# Altium PCB mahdi_ashrafi_moghadam.PcbDoc
Units mm, origin at the board's own origin, x right, y up, seen from the top; angles counter-clockwise.
Board outline 100.08 x 90.01 mm, 2 copper layers (Top Layer, Bottom Layer); 28 components, 23 nets, 114 pads, 16 vias.
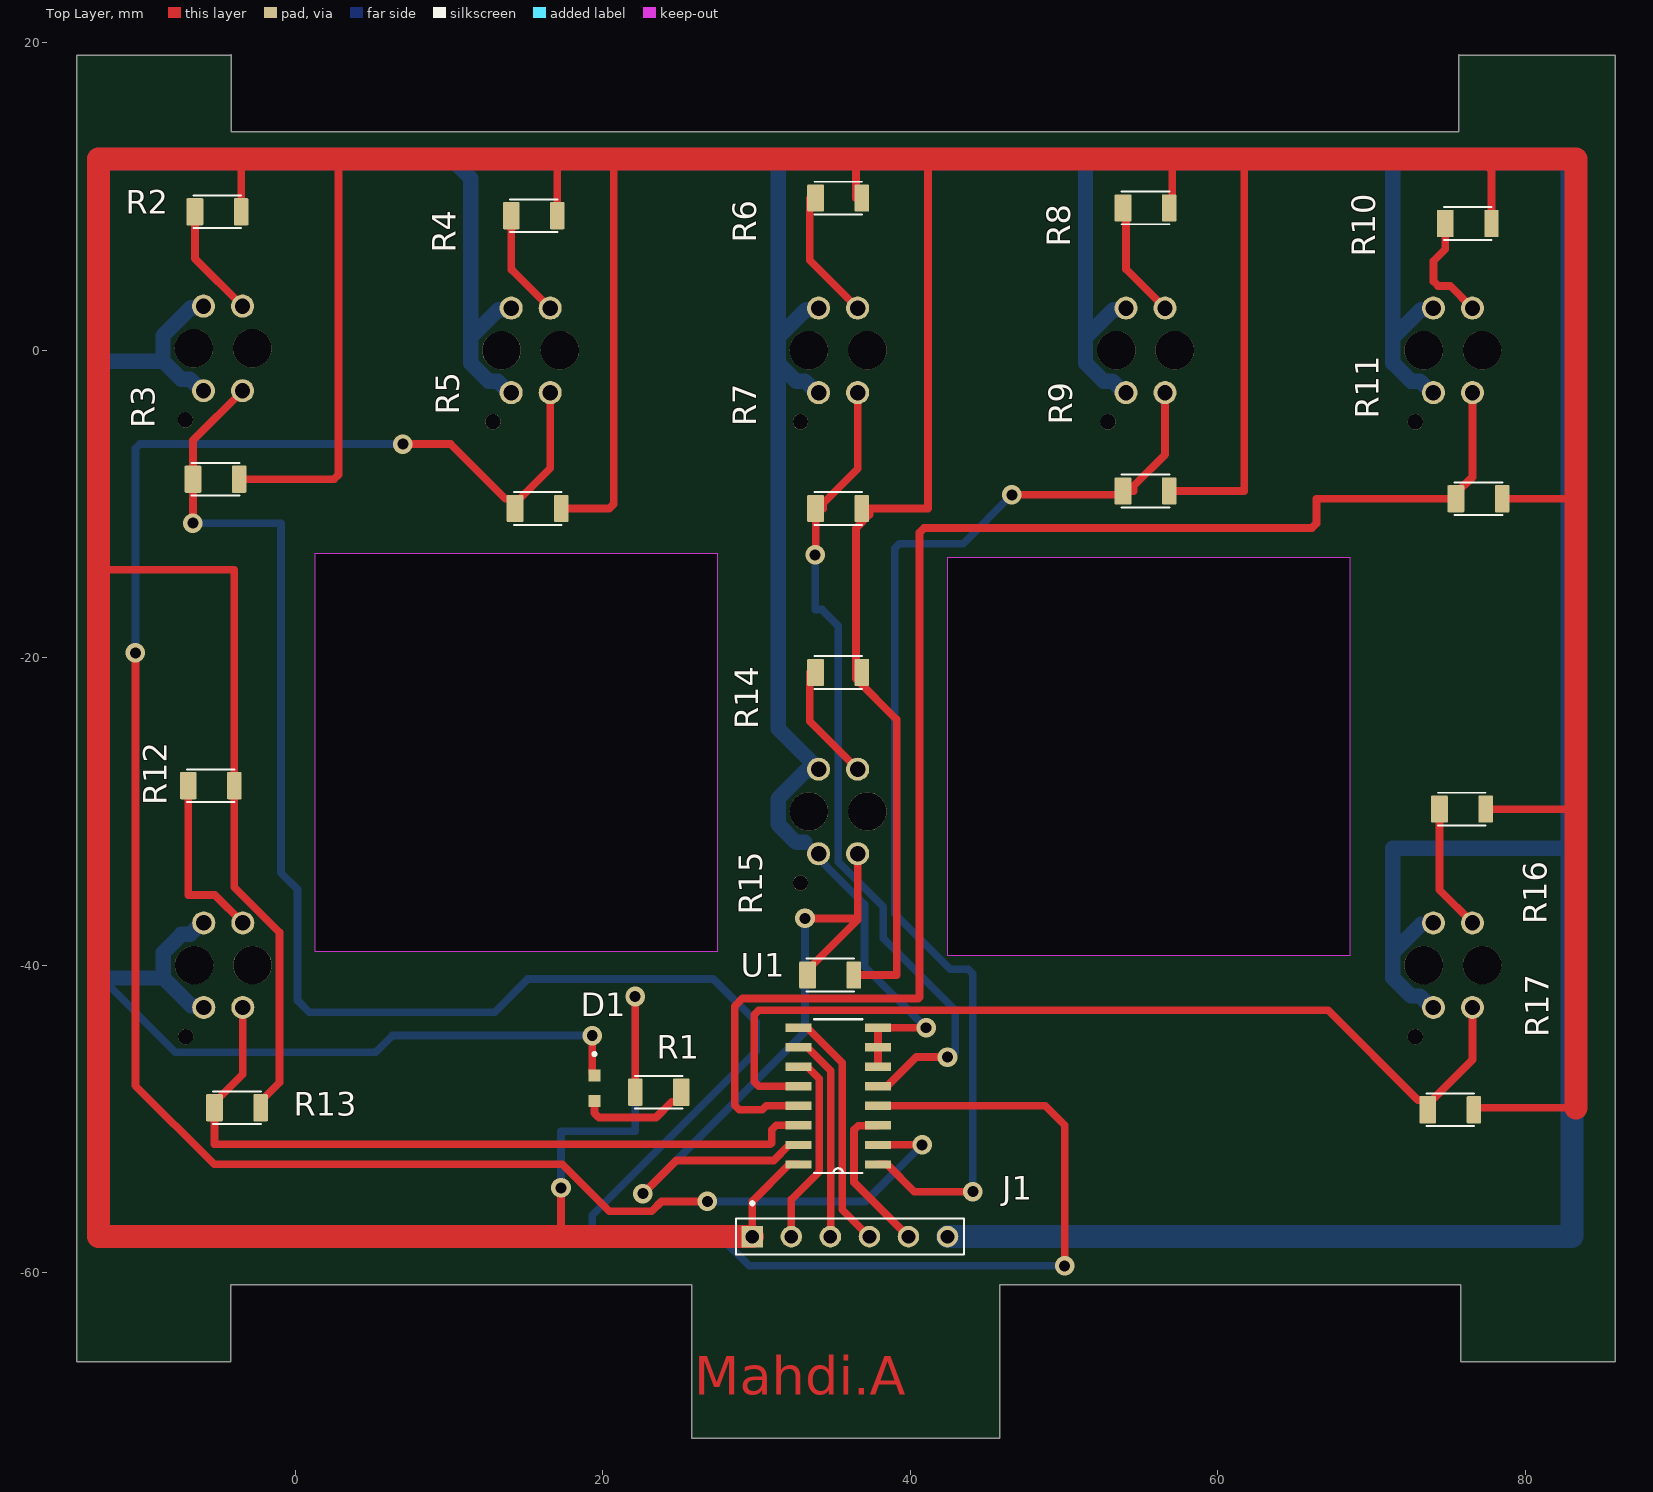
[diagram p0: Top Layer view]
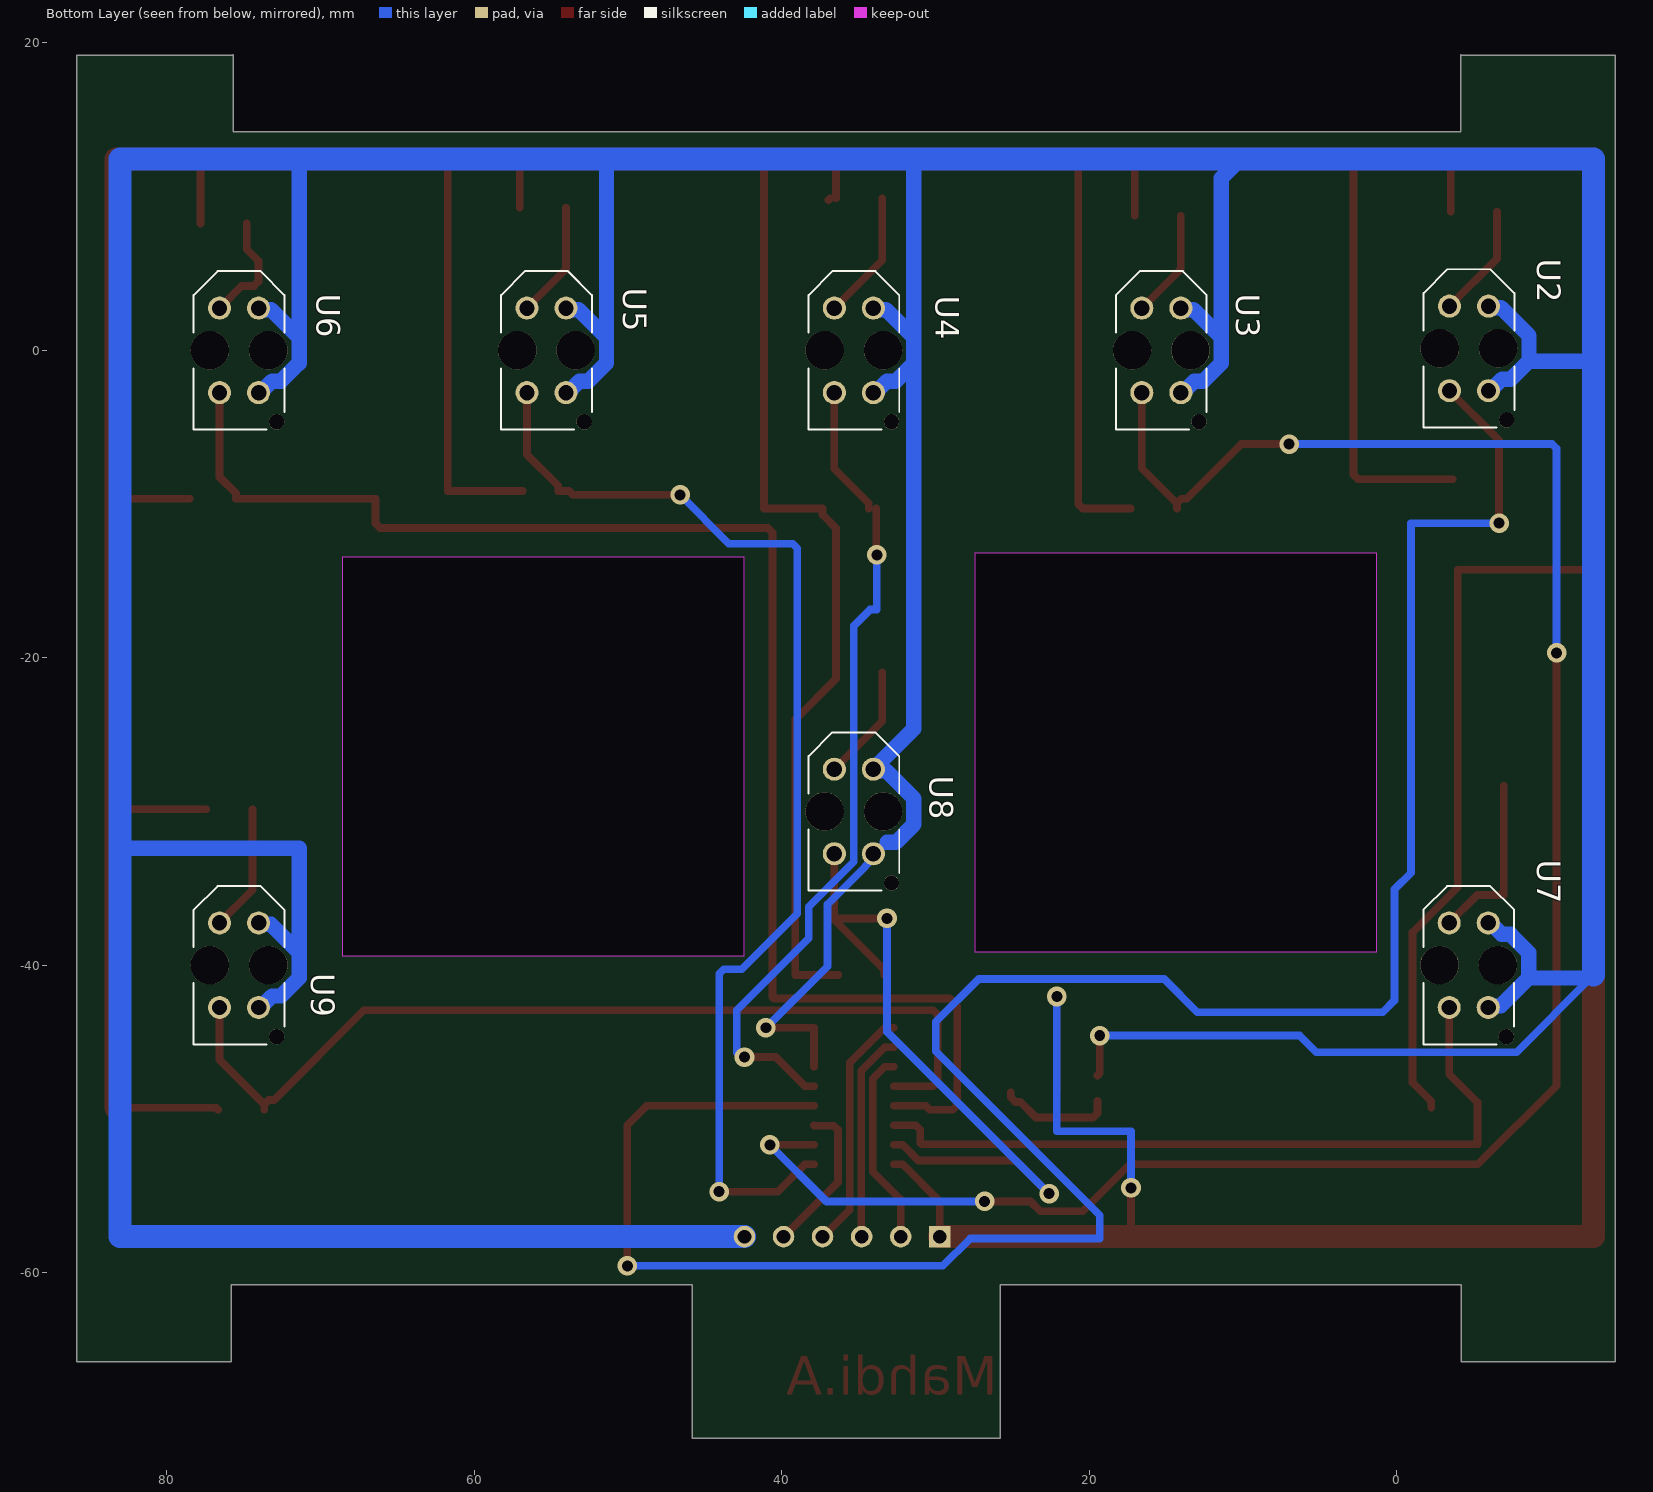
[diagram p1: Bottom Layer view, seen from below]
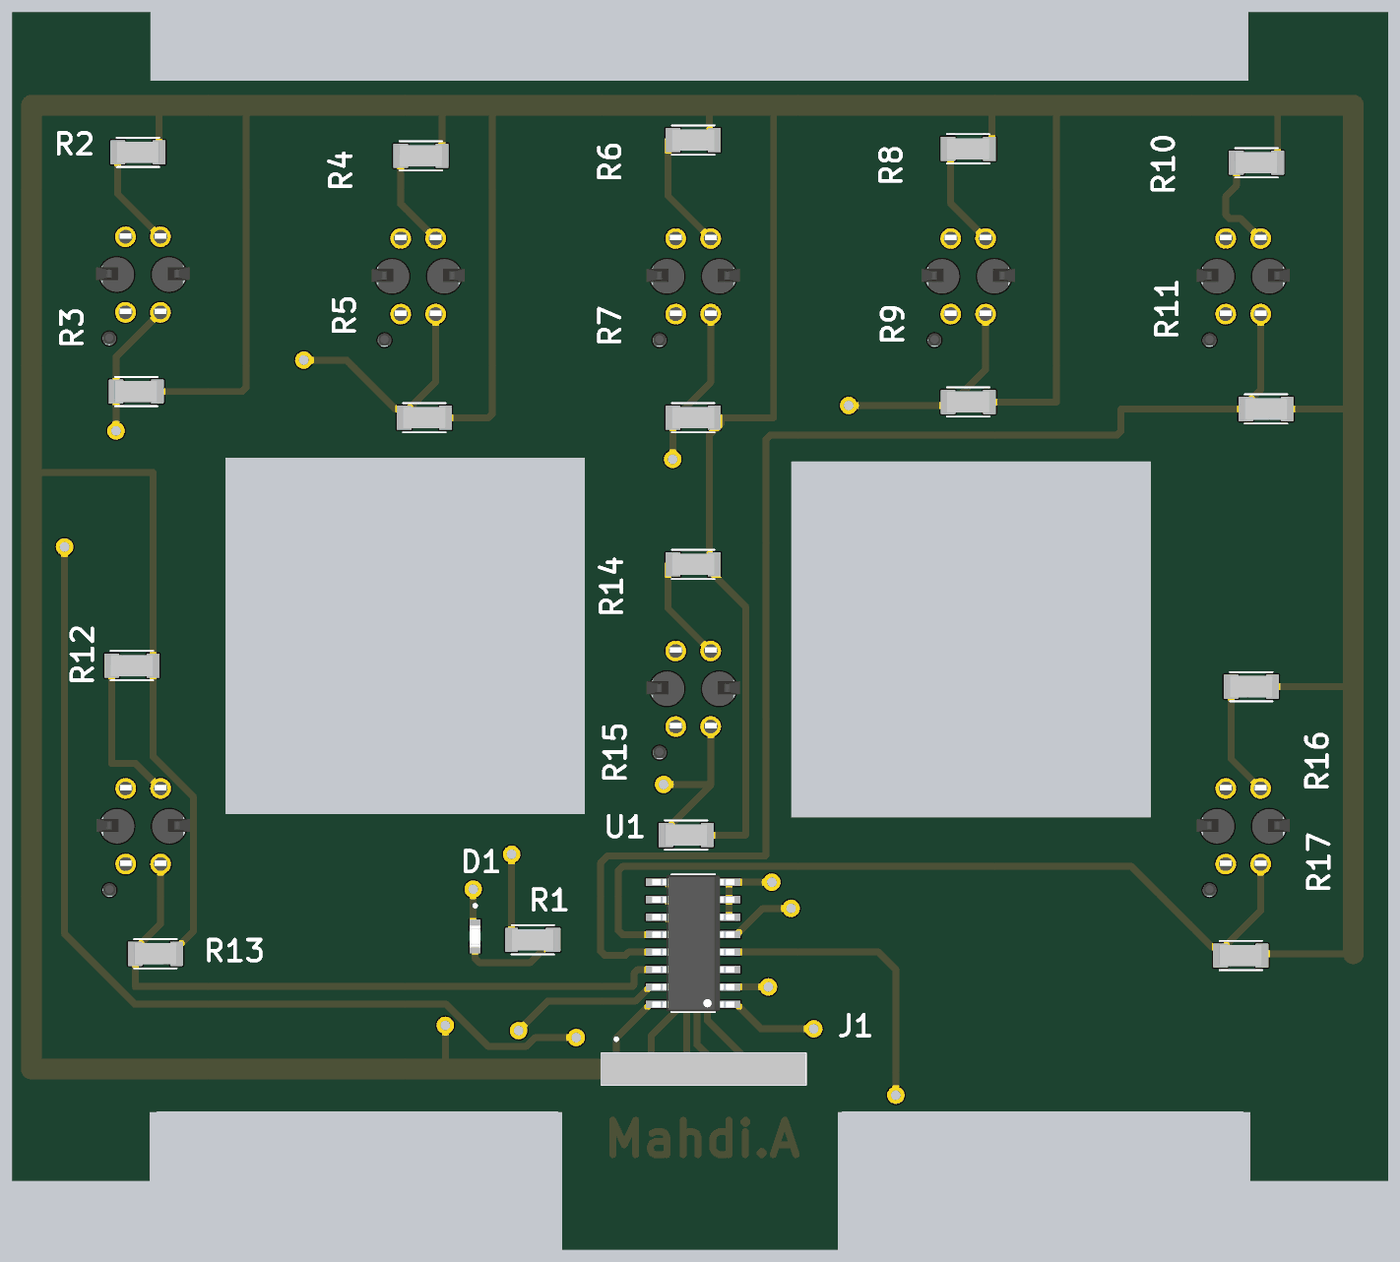
[diagram p2: 3D render of the assembled board from above, using the file's embedded part models]
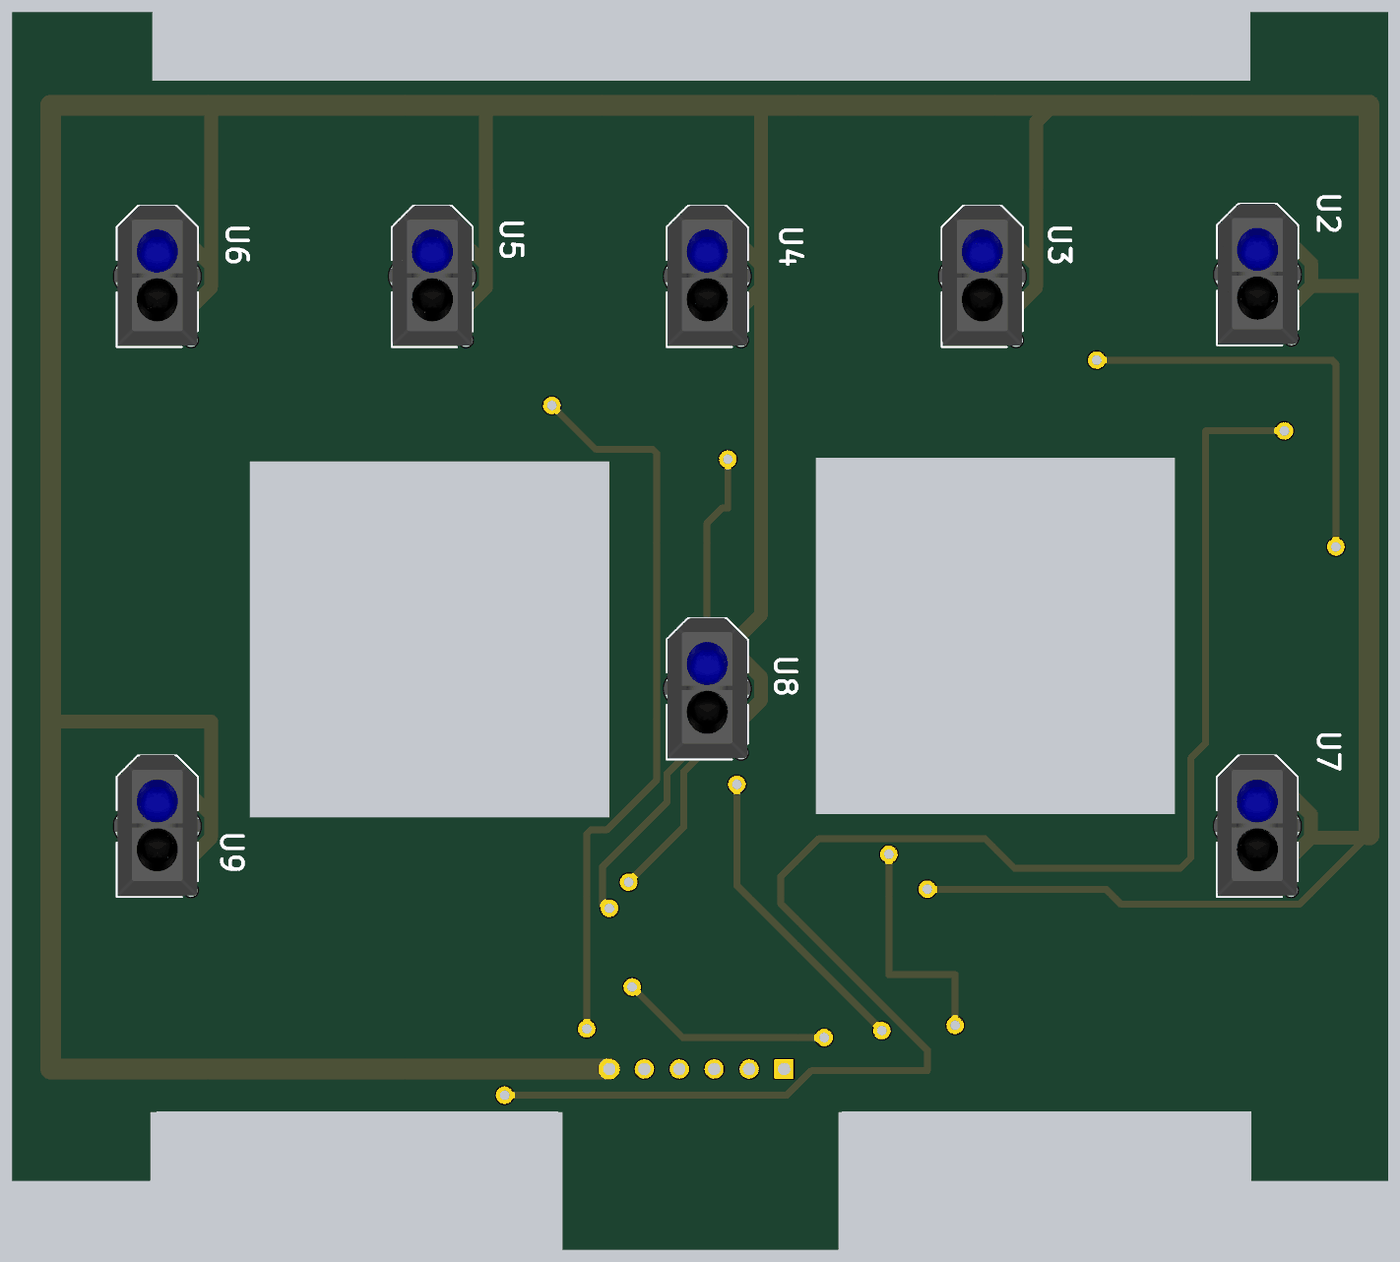
[diagram p3: 3D render of the assembled board from below, using the file's embedded part models]

## Layer stack, top to bottom
Top Solder: solder mask 0.0102, Solder Resist, Dk 3.5
Top Layer: signal copper 0.0356
Dielectric 1: dielectric 0.32, FR-4, Dk 4.8
Bottom Layer: signal copper 0.0356
Bottom Solder: solder mask 0.0102, Solder Resist, Dk 3.5

## Board outline
-14.224,-65.786 -4.224,-65.786 -4.224,-60.786 25.776,-60.786 25.776,-70.786 45.819,-70.786 45.819,-60.786 75.819,-60.786 75.819,-65.786 85.852,-65.786 85.852,19.214 75.729,19.214 75.692,19.224 75.692,14.224 -4.191,14.224 -4.191,19.224 -4.224,19.214 -14.224,19.214
cut-out: 68.58,-13.462 68.58,-39.37 42.418,-39.37 42.418,-13.462
cut-out: 27.432,-13.208 27.432,-39.116 1.27,-39.116 1.27,-13.208

## Design rules (kind name [scope] priority, off if disabled: settings)
Clearance [All] p1: gap=0.254 ignorepadtopadclearanceinfootprint=FALSE except(0: Arc-Hole Track-Hole SMDPad-Hole THPad-Hole Via-Hole Fill-Hole Poly-Hole Region-Hole Text-Hole)
PolygonConnect [All] p1: connectstyle=Relief reliefconductorwidth=0.254 reliefentries=4 polygonreliefangle="90 Angle" airgapwidth=0.254
RoutingVias [All] p1: holewidth=0.711 width=1.27 viastyle="Through Hole" minholewidth=0.711 minwidth=1.27 maxholewidth=0.711 maxwidth=1.27
SolderMaskExpansion [All] p1: expansion=0.102 istentingtop=FALSE
Width [All] p1: maxlimit=1.5 minlimit=0.5 preferedwidth=1 minimp=50.000000 maximp=50.000000 favimp=50.000000
30 further rules are at their usual default settings.

## Components (designator, comment, footprint, x,y, rotation, side; value= is the part's Value field where it differs from the comment)
D1 "KPT-1608ZGC" LED_KPT-1608ZGC 19.447,-48.006 r270 top
J1 "103321-6" TE_103321-6 36.068,-57.658 r0 top
R1 "2-1879462-9" RESC3115X65N 23.638,-48.26 r180 top
R2 "2-1879462-9" RESC3115X65N -5.08,9.017 r0 top
R3 "2-1879462-9" RESC3115X65N -5.207,-8.382 r0 top
R4 "2-1879462-9" RESC3115X65N 15.494,8.763 r0 top
R5 "2-1879462-9" RESC3115X65N 15.748,-10.287 r0 top
R6 "2-1879462-9" RESC3115X65N 35.301,9.906 r0 top
R7 "2-1879462-9" RESC3115X65N 35.301,-10.287 r0 top
R8 "2-1879462-9" RESC3115X65N 55.301,9.271 r0 top
R9 "2-1879462-9" RESC3115X65N 55.301,-9.144 r0 top
R10 "2-1879462-9" RESC3115X65N 76.268,8.255 r0 top
R11 "2-1879462-9" RESC3115X65N 76.962,-9.652 r0 top
R12 "2-1879462-9" RESC3115X65N -5.52,-28.321 r0 top
R13 "2-1879462-9" RESC3115X65N -3.81,-49.276 r0 top
R14 "2-1879462-9" RESC3115X65N 35.301,-20.955 r0 top
R15 "2-1879462-9" RESC3115X65N 34.782,-40.64 r0 top
R16 "2-1879462-9" RESC3115X65N 75.887,-29.845 r0 top
R17 "2-1879462-9" RESC3115X65N 75.125,-49.403 r0 top
U1 "74HC4051D" SOIC127P600X175-16N 35.306,-48.514 r180 top
U2 "TCRT5000" OPTO_TCRT5000 -4.715,0.127 r90 bottom
U3 "TCRT5000" OPTO_TCRT5000 15.301,0 r90 bottom
U4 "TCRT5000" OPTO_TCRT5000 35.301,0 r90 bottom
U5 "TCRT5000" OPTO_TCRT5000 55.301,0 r90 bottom
U6 "TCRT5000" OPTO_TCRT5000 75.301,0 r90 bottom
U7 "TCRT5000" OPTO_TCRT5000 -4.699,-40 r90 bottom
U8 "TCRT5000" OPTO_TCRT5000 35.301,-30 r90 bottom
U9 "TCRT5000" OPTO_TCRT5000 75.301,-40 r90 bottom

## Footprints (in the part's own frame and the unit in brackets; to place one, negate y for a bottom-side part, rotate by r counter-clockwise, add the part's x,y. Pads: shape width x height; smd on the part's side, far side on the other; paste and mask are expansions set on the pad)
LED_KPT-1608ZGC [mm]
  rect 0.8x0.8 smd: 1(0.825,0) 2(-0.825,0)
  silkscreen extent -2.32,-0.1 -2.13,0.1, body extent -0.8,-0.4 0.8,0.4, height 1.1
OPTO_TCRT5000 [mm]
  round 1.5 hole 1: A(2.75,1.27) CATH(2.75,-1.27) COLL(-2.75,1.27) E(-2.75,-1.27)
  round 1 hole 1 unplated: ""(-4.65,-2.45)
  round 2.5 hole 2.5 unplated: ""(0,-1.9) ""(0,1.9)
  silkscreen extent -5.15,-2.95 5.15,2.95, body extent -5.04,-3.4 5.16,3.4, height 7.2
RESC3115X65N [mm]
  rrect14% 1.09x1.77 smd: 1(-1.465,0)
  rrect14% 0.94x1.77 smd: 2(1.54,0)
  silkscreen extent -1.55,-1.06 1.55,1.06, body extent -1.55,-0.77 1.55,0.77, height 0.56
SOIC127P600X175-16N [mil]
  rect 67x21 smd: 1(-102,175) 2(-102,125) 3(-102,75) 4(-102,25) 5(-102,-25) 6(-102,-75) 7(-102,-125) 8(-102,-175) 9(102,-175) 10(102,-125) 11(102,-75) 12(102,-25) 13(102,25) 14(102,75) 15(102,125) 16(102,175)
  silkscreen extent -62,-197 62,197, body extent -118,-195 118,195, height 69
TE_103321-6 [mm]
  rect 1.398x1.398 hole 0.89: 1(-6.35,0)
  round 1.398 hole 0.89: 2(-3.81,0) 3(-1.27,0) 4(1.27,0) 5(3.81,0) 6(6.35,0)
  silkscreen extent -7.42,-1.17 7.42,2.27, body extent -7.42,-1.17 7.42,1.17, height 10.58

## Part data
D1: "1.6x0.8mm Smd Chip Led Lamp", Package="0603 Kingbright", Availability="In Stock", Check_prices=https://www.snapeda.com/parts/KPT-1608ZGC/Kingbright/view-part/?ref=eda, MF=Kingbright, MP=KPT-1608ZGC, Price=None, SnapEDA_Link=https://www.snapeda.com/parts/KPT-1608ZGC/Kingbright/view-part/?ref=snap
J1: "Pin 06 MODII HDR SRST B / A .100CL 6 POS", Package=None, Availability=Unavailable, MF="TE Connectivity", Mouser-Purchase-URL=https://snapeda.com/shop?store=Mouser&id=4238467, MP=103321-6, Price=None, SnapEDA_Link=https://www.snapeda.com/parts/103321-6/TE%20Connectivity/view-part/4238467/?ref=snap
R1 R2 R3 R4 R5 R6 R7 R8 R9 R10 R11 R12 R13 R14 R15 R16 R17: "RES 0.24 OHM 1% 1/4W 1206", Package=1206, Power_Rating=".25 W", Resistance=24, Tolerance=1%, Availability=Unavailable, EU_RoHS_Compliance="Compliant with Exemptions", MF="TE Connectivity", MP=2-1879462-9, Price=None, SnapEDA_Link=https://www.snapeda.com/parts/2-1879462-9/TE%20Connectivity/view-part/2213899/?ref=snap
U1: "1 Circuit IC Switch 8:1 130Ohm 16-SOIC", Package="SOIC-16 Toshiba", Availability="In Stock", Check_prices=https://www.snapeda.com/parts/74HC4051D/Toshiba/view-part/?ref=eda, MF=Toshiba, MP=74HC4051D, Price=None, Purchase-URL=https://pricing.snapeda.com/search/part/74HC4051D/?ref=eda, SnapEDA_Link=https://www.snapeda.com/parts/74HC4051D/Toshiba/view-part/?ref=snap
U2 U3 U4 U5 U6 U7 U8 U9: "950 nm 60 mA Through Hole Reflective Optical Sensor with Transistor Output", Package=None, Availability=Unavailable, MP=TCRT5000, Price=None

## Via types
v1: diameter 1.27, hole 0.711, Top Layer to Bottom Layer, 16 vias

## Nets (pads, with @x,y where several pads share a name; then routed paths per layer and width w, separated by ;. In a path a pad name is that pad's centre, name@x,y a point inside that pad or via, vN(x,y) a via of type N, cw(c..) or ccw(c..) an arc to the next point about the centre after c; other vN are vias at no path point)
+5: J1.1 R1.2 R2.2 R3.2 R4.2 R5.2 R6.2 R7.2 R8.2 R9.2 R10.2 R11.2 R12.2 R13.2 R14.2 R15.2 R16.2 R17.2 U1.16 | length 525.5
  Top Layer w0.5: -12.827,-14.097 -12.657,-14.267 -3.98,-14.267 R12.2 -3.98,-34.926 -1.045,-37.861 -1.045,-47.636 -2.27,-48.861 R13.2 ; -4.064,12.446 -3.54,11.922 R2.2 ; R3.2 2.501,-8.382 2.794,-8.089 2.794,12.446 ; 16.891,12.446 17.034,12.303 R4.2 ; v1(17.272,-54.483) 17.272,-57.531 17.399,-57.658 ; R5.2 20.408,-10.287 20.701,-9.994 20.701,12.192 20.447,12.446 ; R1.2 v1(22.098,-42.037) ; J1.1 29.718,-55.372 32.131,-52.959 U1.16 ; R15.2 39.116,-40.64 39.116,-24.021 36.465,-21.37 36.465,-11.575 37.338,-10.702 37.338,-10.287 41.148,-10.287 41.148,12.192 40.894,12.446 ; R6.2@36.465,9.906 36.465,12.335 36.576,12.446 ; R6.2 36.841,9.895 R6.2@36.957,9.779 ; R9.2 61.722,-9.144 61.722,12.319 61.595,12.446 ; 57.023,12.446 57.039,12.43 R8.2@57.039,9.271 ; R17.2 76.792,-49.276 83.312,-49.276 ; 77.089,12.446 77.808,11.727 R10.2 ; R16.2 83.058,-29.845 83.312,-30.099 ; R11.2 83.312,-9.652
  Top Layer w1.5: J1.1 17.399,-57.658 -12.827,-57.658 -12.827,-14.097 -12.827,12.446 -4.064,12.446 2.794,12.446 16.891,12.446 20.447,12.446 36.576,12.446 40.894,12.446 57.023,12.446 61.595,12.446 77.089,12.446 83.312,12.446 83.312,-9.652 83.312,-30.099 83.312,-49.276
  Bottom Layer w0.5: v1(17.272,-54.483) 17.272,-50.8 22.098,-50.8 v1(22.098,-42.037)
GND: D1.2 J1.6 U1.6 U1.7 U1.8 U2.CATH U2.E U3.CATH U3.E U4.CATH U4.E U5.CATH U5.E U6.CATH U6.E U7.CATH U7.E U8.CATH U8.E U9.CATH U9.E | length 486.5
  Top Layer w0.5: v1(19.304,-44.577) 19.304,-47.038 D1.2 ; U1.6 U1.7 U1.8 v1(41.021,-44.069)
  Bottom Layer w0.5: -12.637,-40.83 -7.813,-45.654 5.227,-45.654 6.304,-44.577 v1(19.304,-44.577) ; 33.15,-32.004 33.963,-32.818 33.963,-32.953 34.563,-33.553 34.563,-33.582 37.012,-36.03 37.012,-40.06 v1(41.021,-44.069)
  Bottom Layer w1: -12.827,-40.64 -12.637,-40.83 -8.603,-40.83 ; -12.827,-0.635 -12.759,-0.703 -8.619,-0.703 ; U2.E -6.12,-2.623 -6.866,-1.877 -7.445,-1.877 -8.619,-0.703 ; U2.CATH -6.081,2.781 -6.795,2.781 -8.619,0.957 -8.619,-0.703 ; U7.E -6.065,-42.654 -6.779,-42.654 -8.603,-40.83 ; U7.CATH -6.104,-37.25 -6.85,-37.996 -7.429,-37.996 -8.603,-39.17 -8.603,-40.83 ; 10.16,12.446 11.397,11.209 11.397,0.83 ; U3.E 13.896,-2.75 13.15,-2.004 12.571,-2.004 11.397,-0.83 11.397,0.83 ; U3.CATH 13.935,2.654 13.221,2.654 11.397,0.83 ; 31.496,12.446 31.397,12.347 31.397,0.83 ; 33.15,-32.004 32.571,-32.004 31.397,-30.83 31.397,-29.17 33.221,-27.346 33.935,-27.346 U8.CATH 31.397,-24.616 31.397,-0.83 ; U4.E 33.896,-2.75 33.15,-2.004 32.571,-2.004 31.397,-0.83 ; U4.CATH 33.935,2.654 33.221,2.654 31.397,0.83 ; 51.181,12.446 51.397,12.23 51.397,0.83 ; U5.E 53.896,-2.75 53.15,-2.004 52.571,-2.004 51.397,-0.83 51.397,0.83 ; U5.CATH 53.935,2.654 53.221,2.654 51.397,0.83 ; 70.993,12.446 71.397,12.042 71.397,0.83 ; U9.E 73.896,-42.75 73.15,-42.004 72.571,-42.004 71.397,-40.83 71.397,-39.17 ; U9.CATH 73.935,-37.346 73.221,-37.346 71.397,-39.17 ; U6.E 73.896,-2.75 73.15,-2.004 72.571,-2.004 71.397,-0.83 71.397,0.83 ; U6.CATH 73.935,2.654 73.221,2.654 71.397,0.83 ; 83.058,-32.385 71.374,-32.385 71.397,-32.408 71.397,-39.17 ; 31.397,-0.83 31.397,0.83
  Bottom Layer w1.5: -12.827,-40.64 -12.827,-0.635 -12.827,12.446 10.16,12.446 31.496,12.446 51.181,12.446 70.993,12.446 83.058,12.446 83.058,-32.385 83.058,-57.658 J1.6
M1: R11.1 U1.13 U6.COLL | length 97.4
  Top Layer w0.5: U1.13 30.626,-49.149 30.372,-49.403 28.868,-49.403 28.575,-49.11 28.575,-42.672 29.083,-42.164 40.513,-42.164 40.601,-42.076 40.601,-11.85 40.894,-11.557 66.128,-11.557 66.421,-11.264 66.421,-9.652 R11.1 75.497,-9.312 76.571,-8.238 U6.COLL
M2: R13.1 U1.14 U7.COLL | length 48.7
  Top Layer w0.5: U7.COLL -3.429,-47.09 -5.275,-48.936 R13.1 -5.275,-51.658 30.892,-51.658 30.988,-51.562 30.988,-50.712 31.281,-50.419 U1.14
M3: R15.1 U1.15 U8.COLL | length 46.4
  Top Layer w0.5: v1(22.606,-54.864) 24.765,-52.705 31.115,-52.705 32.131,-51.689 U1.15 ; v1(33.147,-36.957) 36.482,-36.957 36.571,-37.046 ; R15.1 33.317,-40.3 36.571,-37.046 ; U8.COLL 36.571,-37.046
  Bottom Layer w0.5: v1(22.606,-54.864) 33.147,-44.323 v1(33.147,-36.957)
M4: R17.1 U1.12 U9.COLL | length 61.7
  Top Layer w0.5: U1.12 30.138,-47.879 29.845,-47.586 29.845,-43.219 30.138,-42.926 67.183,-42.926 73.025,-48.768 73.365,-48.768 R17.1@73.66,-49.063 ; R17.1 R17.1@73.66,-49.063 ; U9.COLL 76.571,-46.152 R17.1@73.66,-49.063
M5: R9.1 U1.1 U5.COLL | length 75.9
  Top Layer w0.5: U1.1 38.481,-52.959 40.259,-54.737 v1(44.069,-54.737) ; v1(46.609,-9.398) 53.582,-9.398 R9.1 54.542,-9.144 54.542,-8.804 56.571,-6.775 U5.COLL
  Bottom Layer w0.5: v1(44.069,-54.737) 44.069,-40.552 43.776,-40.259 42.594,-40.259 38.989,-36.654 38.989,-12.866 39.282,-12.573 43.434,-12.573 v1(46.609,-9.398)
M6: R7.1 U1.5 U4.COLL | length 53.9
  Top Layer w0.5: v1@33.782,-13.335 v1(33.809,-13.308) 33.836,-13.281 R7.1 ; R7.1@34.333,-10.287 34.333,-9.947 36.571,-7.709 U4.COLL ; U1.5 38.481,-47.879 40.386,-45.974 v1(42.418,-45.974)
  Bottom Layer w0.5: v1(33.809,-13.308) 33.809,-16.864 34.251,-16.864 35.317,-17.93 35.317,-33.24 35.317,-33.269 38.235,-36.187 38.235,-38.235 42.926,-42.926 42.926,-45.681 42.633,-45.974 v1(42.418,-45.974)
M7: R5.1 U1.2 U3.COLL | length 135.9
  Top Layer w0.5: v1(-10.414,-19.685) -10.414,-47.831 -5.294,-52.951 17.351,-52.951 20.403,-56.003 23.18,-56.003 23.811,-55.372 v1(26.797,-55.372) ; v1(6.985,-6.096) 10.092,-6.096 13.648,-9.652 13.988,-9.652 R5.1@14.283,-9.947 ; R5.1 R5.1@14.283,-9.947 ; U3.COLL 16.571,-7.659 R5.1@14.283,-9.947 ; U1.2 v1(40.767,-51.689)
  Bottom Layer w0.5: v1(-10.414,-19.685) -10.414,-6.389 -10.121,-6.096 v1(6.985,-6.096) v1@7.239,-6.096 ; v1@26.67,-55.372 v1(26.797,-55.372) 37.084,-55.372 v1(40.767,-51.689)
M8: R3.1 U1.4 U2.COLL | length 151.2
  Top Layer w0.5: v1(-6.672,-11.244) R3.1 -6.672,-5.85 U2.COLL ; U1.4 48.768,-49.149 50.038,-50.419 v1(50.038,-59.563)
  Bottom Layer w0.5: v1(-6.672,-11.244) -0.948,-11.244 -0.948,-33.977 0.127,-35.052 0.127,-42.291 0.889,-43.053 12.958,-43.053 15.113,-40.898 27.182,-40.898 29.972,-43.688 29.972,-45.593 19.304,-56.261 19.304,-57.785 27.734,-57.785 29.512,-59.563 v1(50.038,-59.563)
NetD1_1: D1.1 R1.1 | length 7.4
  Top Layer w0.5: D1.1 19.447,-49.618 19.74,-49.911 23.452,-49.911 24.468,-48.895 24.808,-48.895 25.103,-48.6 R1.1
NetR2_1: R2.1 U2.A | length 7.4
  Top Layer w0.5: R2.1 -6.545,5.977 U2.A
NetR4_1: R4.1 U3.A | length 7.1
  Top Layer w0.5: R4.1 14.029,5.259 14.081,5.207 14.114,5.207 U3.A
NetR6_1: R6.1 U4.A | length 8.4
  Top Layer w0.5: R6.1@33.46,9.906 33.46,5.861 U4.A
NetR8_1: R8.1 U5.A | length 7.6
  Top Layer w0.5: R8.1@54.034,9.271 54.034,5.287 U5.A
NetR10_1: R10.1 U6.A | length 7.3
  Top Layer w0.5: R10.1 74.803,6.58 74.041,5.818 74.041,4.484 74.334,4.191 75.13,4.191 U6.A
NetR12_1: R12.1 U7.A | length 11.4
  Top Layer w0.5: R12.1 -6.985,-35.433 -5.246,-35.433 U7.A
NetR14_1: R14.1 U8.A | length 7.6
  Top Layer w0.5: R14.1@33.46,-20.955 33.46,-24.139 U8.A
NetR16_1: R16.1 U9.A | length 8.3
  Top Layer w0.5: R16.1 74.422,-35.101 U9.A
Out: J1.5 U1.3 | length 10.1
  Top Layer w0.5: U1.3 37.88,-50.436 36.608,-50.436 36.332,-50.712 36.332,-54.112 J1.5
S1: J1.2 U1.11 | length 12.7
  Top Layer w0.5: J1.2 32.258,-55.247 34.07,-53.434 34.07,-47.38 33.299,-46.609 U1.11
S2: J1.3 U1.10 | length 13.5
  Top Layer w0.5: U1.10 33.299,-45.339 34.824,-46.864 34.824,-57.632 J1.3
S3: J1.4 U1.9 | length 15.8
  Top Layer w0.5: U1.9 33.299,-44.069 35.578,-46.348 35.578,-55.898 J1.4
pads on no net: U2. U3. U4. U5. U6. U7. U8. U9.

## Other copper
Top Layer:
  text "Mahdi.A" at 25.941,-67.945 h2.5

## Silkscreen, mask and mechanical layers (free items; w line width, h text height)
Mechanical 1:
  lines w0.254: -4.224,19.214 -14.224,19.214 -14.224,-65.786 -4.224,-65.786 -4.224,-60.786 25.776,-60.786 25.776,-70.786 45.819,-70.786 45.819,-60.786 75.819,-60.786 75.819,-65.786 85.819,-65.786 ; -4.191,19.224 -4.191,14.224 75.692,14.224 75.692,19.224 ; 75.729,19.214 85.852,19.214 85.852,-65.786